# Altium PCB CME_M5_DevBrd_V1.PcbDoc (part 2 of 2)
Units mil, origin at the board's own origin, x right, y up, seen from the top; angles counter-clockwise.
Board outline 3755 x 3680 mil, 2 copper layers (Top Layer, Bottom Layer); 105 components, 0 nets, 635 pads, 230 vias.
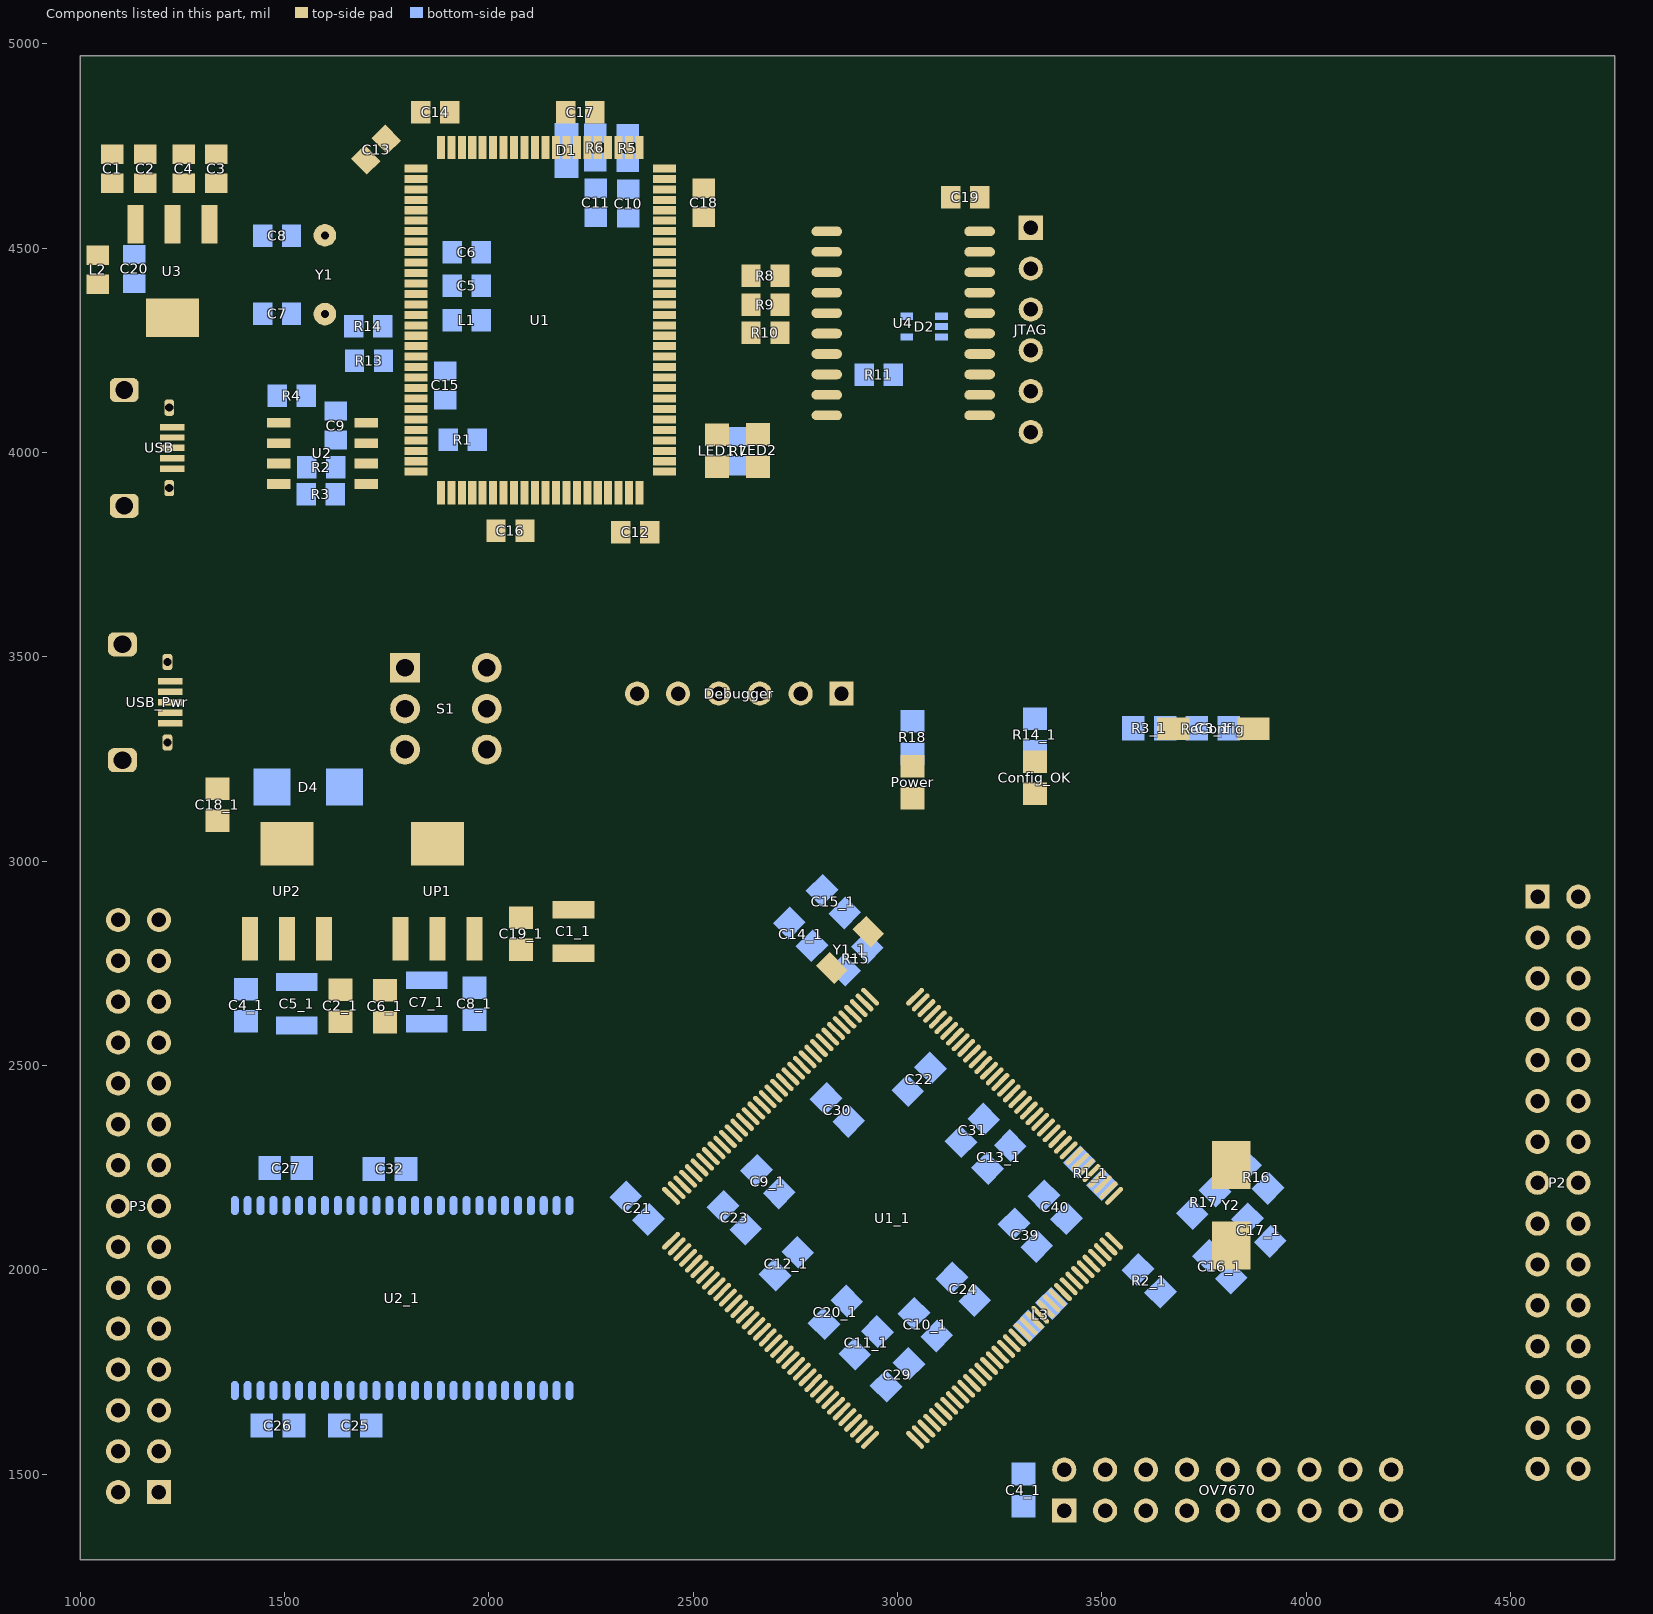
[diagram p2: the components of this part, seen from the top]

## Via types
v1: diameter 24, hole 12, Top Layer to Bottom Layer, 228 vias
v2: diameter 30, hole 15, Top Layer to Bottom Layer, 2 vias

## Nets (pads, with @x,y where several pads share a name; then routed paths per layer and width w, separated by ;. In a path a pad name is that pad's centre, name@x,y a point inside that pad or via, vN(x,y) a via of type N, cw(c..) or ccw(c..) an arc to the next point about the centre after c; other vN are vias at no path point) (continued)
copper on no net: | length 191772.4
  Top Layer w10: 1022,3343 1022,1527 1093,1456 ; 1026,3344 1121.83,3439.83 1220.5,3439.83 1761.83,3439.83 1795,3473 1845,3523 2800,3523 2863,3460 2863,3410 ; 1093,1656 1143,1606 1212,1606 1343,1737 1343,2170 1378,2205 2421.82,2205 2445.84,2180.98 ; 1193,1656 1322,1785 1322,2179 1367,2224 2167,2224 2452,2509 2591.08,2509 2682.47,2417.61 ; 1193,1756 1302,1865 1302,2186 1360,2244 2160,2244 2445,2529 2598.92,2529 2696.39,2431.53 ; 1193,1856 1282,1945 1282,2192 1354,2264 2155,2264 2440,2549 2606.76,2549 2710.31,2445.45 ; 1193,1956 1261,2024 1261,2199 1346,2284 2148,2284 2433,2569 2614.6,2569 2724.23,2459.37 ; 1193,2056 1193,2078 1242,2127 1242,2209 1337,2304 2143,2304 2428,2589 2622.44,2589 2738.15,2473.29 ; 1193,2156 1193,2187 1330,2324 2135,2324 2420,2609 2658.11,2609 2765.99,2501.13 ; 1193,2256 1231,2256 1319,2344 2129,2344 2414,2629 2665.95,2629 2779.9,2515.05 ; 1193,2356 1201,2364 2122,2364 2407,2649 2673.79,2649 2793.82,2528.97 ; 1193,2456 1265,2384 2115,2384 2400,2669 2681.63,2669 2807.74,2542.89 ; 1193,2556 1241,2508 1241,2442 1275,2408 2112.63,2408 2393.63,2689 2689.47,2689 2821.66,2556.81 ; 1193,2656 1193,2627 1262,2558 1262,2452 1287,2427 2102,2427 2384,2709 2725.15,2709 2849.5,2584.64 ; 1193,2756 1193,2733 1285,2641 1285,2464 1304,2445 2094,2445 2378,2729 2732.99,2729 2863.42,2598.56 ; 1193,2855 1308,2740 1308,2488 1330,2466 2084,2466 2367,2749 2740.82,2749 2877.34,2612.48 ; v1@1405.5,2103.5 1490,2019 2449.5,2019 2473.68,2043.18 ; v1(1408,1756) 1413,1761 1413,1781 1474,1842 2467.37,1842 2571.11,1945.74 ; v1(1462,4112.83) 1462,4096.54 1485.72,4072.83 ; v1(1504.54,1985) 1515.54,1996 2452.49,1996 2459.49,2003 2460.06,2003 2485.75,2028.69 ; v1(1518,1866) 2463.53,1866 2557.19,1959.66 ; 1599,4338.37 1699.61,4438.98 1821.73,4438.98 ; 1599,4531.28 1609.54,4531.28 1676.25,4464.58 1821.73,4464.58 ; 1635,3242 1666,3273 1795,3273 ; v1(1643,1891) 2460.69,1891 2543.27,1973.58 ; v1@1643,1971 2457.18,1971 2501.52,2015.34 ; v1(1664,3965.83) 1693.28,3965.83 1700.28,3972.83 1741,3972.83 1746.53,3978.36 1821.73,3978.36 ; v1(1665.57,3898.83) 1676.28,3898.83 1700.28,3922.83 1801,3922.83 1821.73,3943.56 1821.73,3952.76 ; 1698.94,4715.77 1745.42,4669.3 1821.73,4669.3 ; v1(1699,1926) 1708,1917 2458.85,1917 2529.35,1987.5 ; v1(1761,4247.83) 1773.02,4259.85 1821.73,4259.85 ; v1(1761,4296.83) 1772.39,4285.44 1821.73,4285.44 ; v1@1762,1946 1763,1947 2466.23,1947 2496.44,1977.22 2496.44,1978.5 2511.5,1993.56 2511.5,2001.42 2515.44,2001.42 ; v1(1764,4172.83) 1773.5,4182.33 1820.98,4182.33 1821.73,4183.08 ; 1821.73,4208.67 1866.16,4208.67 v1(1867,4207.83) ; 1821.73,4234.26 1821.73,4234.83 1861,4234.83 v1(1872,4245.83) ; 1821.73,4311.03 1822.48,4310.28 1867.54,4310.28 v1(1868,4309.83) ; 1821.73,4413.39 1895.43,4413.39 1896,4412.83 ; 1821.73,4490.17 1822.48,4489.42 1867.41,4489.42 v1(1868,4488.83) ; v1(1850,1754) 1910,1814 2216,1814 2317,1713 2505.4,1713 2654.63,1862.23 ; v1(1884,1581) 1884,1517 2023,1378 2785,1378 2990.84,1583.84 3042.98,1583.84 ; 1904.43,4831.83 1907.6,4828.66 1907.6,4746.82 1908.35,4746.07 ; v1(1937,1542) 1937,1513 2048,1402 2695.5,1402 2905.18,1611.68 ; 1977.17,3978.83 1933.94,3935.59 1933.94,3901.58 1933.94,3855.89 1981,3808.83 2017.57,3808.83 2017.57,3821.39 2061.89,3865.72 2061.89,3901.58 2062,3901.69 2062,3978.83 ; v1(2023,4664.83) 2036.3,4678.13 2036.3,4746.07 ; v1(2028,1471) 2073,1426 2691.66,1426 2891.26,1625.6 ; v1(2065,1530) 2115,1480 2634.31,1480 2835.58,1681.27 ; v1(2077,1471) 2092,1456 2645,1456 2787.01,1598.01 2808,1598.01 2863.42,1653.44 ; 2087.48,3901.58 2088.23,3900.84 2088.23,3809.03 2088.43,3808.83 ; v1(2105,1577) 2154,1528 2626.63,1528 2807.74,1709.11 ; v1(2107,1530) 2108,1530 2136,1502 2628.47,1502 2821.66,1695.19 ; v1(2134,1614) 2134,1604 2188,1550 2620.79,1550 2793.82,1723.03 ; v1(2169,1656) 2169,1619 2215,1573 2615.95,1573 2779.9,1736.95 ; v1(2204,4648.83) 2234.71,4618.12 2430,4618.12 ; 2259.43,4831.83 2266.61,4824.65 2266.61,4746.07 ; v1(2262,1819) 2266,1823 2476.21,1823 2585.03,1931.82 ; v1(2292,3946.83) 2292.2,3946.62 2292.2,3901.58 ; v1(2304,1794) 2309,1799 2491,1799 2566,1874 2582.89,1874 2612.87,1903.99 ; 2317.8,3901.58 2317.8,3809.6 2322.57,3804.83 ; 2335,3978.83 2343.39,3970.44 2343.39,3901.58 2343.39,3856.4 2393.43,3806.36 2393.43,3804.83 ; v1(2347,1768) 2500.79,1768 2622.86,1890.07 2626.79,1890.07 ; 2356,3978.83 2381.12,4003.95 2430,4003.95 ; v1(2365,4673.83) 2425.47,4673.83 2430,4669.3 ; v1(2372,4317.83) 2377.18,4317.83 2395.23,4335.87 2429.25,4335.87 2430,4336.62 ; v1(2380.66,2274) 2459.76,2194.9 ; v1(2383,4361.83) 2429.61,4361.83 2430,4362.21 ; v1(2387,1738) 2502.56,1738 2640.71,1876.15 ; v1(2415,1684) 2504.24,1684 2668.55,1848.31 ; v1(2426,2287) 2451.18,2287 2501.52,2236.66 ; 2430,4106.31 2430.75,4107.06 2492.8,4107.06 2579,4193.26 2579,4230.26 2641.57,4292.83 ; 2430,4131.9 2430.75,4132.65 2490.1,4132.65 2559,4201.54 2559,4282.65 2625.17,4348.83 2641.57,4348.83 ; 2430,4157.49 2486.66,4157.49 2538,4208.83 2538,4335.26 2641.57,4438.83 ; 2430,4311.03 2485.8,4311.03 2493,4303.83 v1(2493,4228.83) ; 2430,4387.8 v1(2480,4387.83) ; 2430,4566.94 2517.54,4566.94 2526,4575.39 ; 2430,4643.71 2523.45,4643.71 2526,4646.26 ; 2444.98,2071.88 2499.09,2126 v1(2503,2126) 2503,2141 2518,2156 2518,2192.34 2487.6,2222.74 ; v1(2448.01,2318) 2515.44,2250.58 ; v1(2449,1654) 2502.08,1654 2682.47,1834.39 ; v1(2455,2437) 2523.89,2437 2612.87,2348.01 ; v1(2464,2485) 2531.56,2485 2640.71,2375.85 ; v1@2479.93,2313.93 2529.35,2264.5 ; v1(2484.53,2365) 2557.19,2292.34 ; v1@2490,2462 2526.73,2462 2626.79,2361.93 ; v1(2493,2413) 2520.05,2413 2598.95,2334.1 ; v1(2503,1627) 2696.39,1820.39 2696.39,1820.47 ; v1(2525,2369) 2536.21,2369 2585.03,2320.18 ; v1(2535,1602) 2535,1631.24 2710.31,1806.55 ; 2543.27,2278.42 2575.69,2246 v1(2628,2246) ; 2558,3964.46 2578.63,3943.83 v1(2608,3943.83) 2637.37,3943.83 2659,3965.46 ; v1(2568,1631) 2568,1636.4 2724.23,1792.63 ; 2598.95,1917.9 2662.05,1981 2668,1981 v1(2673,1986) ; v1(2604,2452) 2604,2440 2654.23,2389.77 2654.63,2389.77 ; v1(2613,1648) 2613,1653.56 2738.15,1778.71 ; 2668.55,2403.69 2754,2318.24 2754,2316 ; 2712.43,4292.83 2824.99,4292.83 2826.99,4290.83 ; 2712.43,4360.83 2769,4360.83 2804,4395.83 2821.99,4395.83 2826.99,4390.83 ; 2712.43,4438.83 2746,4438.83 2798,4490.83 2826.99,4490.83 2819.99,4497.83 ; v1(2749,1520) 2757.82,1520 2877.34,1639.52 ; 2773.14,1785.86 v1(2848,1860.73) ; 2826.99,4190.83 2877,4190.83 v1(2878,4189.83) ; 2828.46,2741.46 2831.88,2741.46 2910.17,2663.17 ; 2849.15,2557.15 2903,2503.31 v1(2903,2496) ; 2849.5,1667.36 2898,1715.85 v1(2898,1761) ; v1(2855,1506) 2855,1533.66 2919.1,1597.76 ; v1@2917.54,2830.54 2948,2800.08 2948,2683.14 2933.88,2669.02 ; 2933.02,1583.84 2978,1628.82 v1(2978,1721) 3017.18,1721 3085.09,1653.09 ; v1(2993,2506) 3088,2601 ; v1(3027,4259.83) 3055,4231.83 3192.01,4231.83 3201.01,4240.83 ; 3042.98,2668.16 3329.82,2955 4624,2955 4666,2913 ; 3056.9,1597.76 3300.66,1354 3471,1354 3508,1391 3508,1411 ; 3056.9,2654.24 3337.66,2935 4462,2935 4536,2861 4618,2861 4666,2813 ; 3070.82,2640.32 3342.5,2912 4433,2912 4472.71,2872.29 4472.71,2821.29 4539,2755 4624,2755 4666,2713 ; 3084.74,1625.6 3258.34,1452 3567,1452 3608,1411 ; 3084.74,2626.4 3347.34,2889 4328,2889 4562,2655 4624,2655 4666,2613 ; v1(3106,1822) 3113,1815 3113,1708.69 3140.42,1681.27 ; v1(3108,4352.83) 3108,4399.83 3107,4400.83 3147,4440.83 3201.01,4440.83 ; 3112.58,1653.44 3205.01,1561 3441,1561 3460,1542 3460,1494 3486,1468 3675,1468 3708,1435 3708,1411 ; 3112.58,2598.56 3116.51,2598.56 3116.51,2606.43 3379.08,2869 4245,2869 4547,2567 4612,2567 4666,2513 ; v1(3121,4271.83) 3121,4279.83 3182,4340.83 3201.01,4340.83 ; 3126.5,1667.35 3169.85,1624 v1(3179,1624) ; 3126.5,2584.65 3389.85,2848 4038,2848 4425,2461 4618,2461 4666,2413 ; 3140.42,2570.73 3374.24,2804.55 4045.45,2804.55 4484,2366 4613,2366 4666,2313 ; 3147.21,1758 3182.18,1723.03 ; 3148,2463 3148,2466.95 3196.1,2515.05 ; 3154.34,1695.19 3232,1617.53 v1(3232,1603) ; 3154.34,2556.81 3369.53,2772 4028,2772 4539,2261 4618,2261 4666,2213 ; 3168.26,1709.11 3297.37,1580 3487,1580 3508,1559 3508,1511 ; 3168.26,2542.89 3372,2746.63 3942.37,2746.63 4528,2161 4618,2161 4666,2113 ; v1(3178,1903) 3178,1866.4 3251.77,1792.63 ; 3182.18,2528.97 3379.21,2726 3867,2726 4525,2068 4611,2068 4666,2013 ; 3196.1,1736.95 3234,1699.05 3234,1681 3317,1598 3560,1598 3608,1550 3608,1511 ; 3201.01,4540.83 3201.43,4541.25 ; 3210.01,1750.87 3270,1690.89 v1(3270,1681) ; 3210.01,2501.13 3408.89,2700 3781,2700 4526,1955 4624,1955 4666,1913 ; 3223.93,1764.79 3372.73,1616 3636,1616 3708,1544 3708,1511 ; 3223.93,2487.21 3414,2677.27 3756.73,2677.27 4493,1941 4493,1888 4516,1865 4614,1865 4666,1813 ; 3237.85,1778.71 3376.56,1640 3664,1640 3757,1547 3757,1462 3808,1411 ; 3237.85,2473.29 3183,2418.44 3183,2361 3228,2316 v1(3293,2316) 3303.27,2316 3349.21,2361.93 ; v1(3241,1888) 3241,1886.92 3293.53,1834.39 ; v1(3243,2371) 3274.76,2371 3307.45,2403.69 ; 3251.77,2459.37 3449.4,2657 3738,2657 4437,1958 4437,1855 4524,1768 4611,1768 4666,1713 ; 3265.69,1806.55 3409.12,1663.12 ; 3265.69,2445.45 3455.24,2635 3725,2635 4409,1951 4409,1758 4507,1660 4619,1660 4666,1613 ; 3279.61,1820.47 3414.08,1686 3729,1686 3859,1556 3859,1460 3908,1411 ; 3279.61,2431.53 3400.08,2552 3699,2552 v1(3726,2579) ; 3280,2265 3280.11,2265 3363.13,2348.01 ; 3287,2186 3404.89,2303.89 3404.89,2306.26 ; 3293.53,2417.61 3336.92,2461 v1@3338,2461 ; 3307.45,1848.31 3444.76,1711 3745,1711 3908,1548 3908,1511 ; 3321.37,1862.23 3450.6,1733 3792,1733 3960,1565 3960,1459 4008,1411 ; 3321.37,2389.77 3463,2531.4 3668.6,2531.4 v1(3673,2527) ; 3335.29,1876.15 3455.44,1756 3816,1756 4008,1564 4008,1511 ; 3335.29,2375.85 3453.44,2494 v1(3695,2494) ; 3349.21,1890.07 3462.27,1777 3841,1777 4060,1558 4060,1459 4108,1411 ; 3363.13,1903.99 3473.11,1794 4022,1794 4303,1513 4566,1513 ; 3366.47,2012 3418.81,1959.66 ; 3377.05,1917.9 3475.87,1819.08 4067.92,1819.08 4274,1613 4566,1613 ; 3377.05,2334.1 3511.95,2469 3704,2469 v1(3748,2513) ; 3390.97,1931.82 3487.71,1835.08 4076.92,1835.08 4270,1642 v1(4412,1642) ; 3390.97,2320.18 3519.79,2449 3750,2449 v1(3775,2474) ; v1(3395,2243) 3397.31,2243 3432.73,2278.42 3430.42,2278.42 ; 3404.89,1945.74 3498.63,1852 4086,1852 4265,1673 v1(4379,1673) ; 3409.12,1663 3684,1663 3792,1555 3792,1527 3808,1511 ; 3418.81,2292.34 3557.47,2431 3844,2431 v1(3858,2445) ; 3432.73,1973.58 3470,1936.31 3470,1912 3509,1873 4094,1873 4260,1707 v1(4345,1707) ; 3446.64,1987.5 3542.15,1892 4120,1892 4258,1754 v1(4345,1754) ; 3446.64,2264.5 3489,2306.85 3489,2331 3563,2405 v1(3593,2405) ; 3460.56,2001.42 3550.99,1911 4133.37,1911 4246.37,1798 v1(4321,1798) ; 3460.56,2250.58 3524,2314.01 v1(3524,2325) ; 3474.48,2015.34 3562.82,1927 4152,1927 4257,1822 v1(4285,1822) ; 3474.48,2236.66 3586.82,2349 3603,2349 v1(3606,2352) ; 3488.4,2029.26 3573.66,1944 4244,1944 v1(4249,1949) ; 3488.4,2222.74 3557.66,2292 v1(3569,2292) ; 3502.32,2208.82 3554.5,2261 3585,2261 v1(3609,2285) ; 3513.53,2031.53 3574.06,1971 3581.06,1978 v1(3588,1978) ; 3516.24,2194.9 3549.34,2228 3594,2228 3614,2248 v1(3617,2248) ; 3525.17,2048.17 3555.34,2018 3675,2018 v1(3724,2067) ; 3530.16,2071.02 3563.02,2071.02 v1@3686.5,2194.5 ; 3531.02,2180.12 3550.14,2161 v1(3553,2161) ; 3801,2267 3852,2267 3884,2235 v1(3884,2167)
  Top Layer w15: 1043,4411.39 1043,4106.83 1087.74,4062.08 1224.93,4062.08 ; 1224.93,4010.9 1225.15,4010.69 1269.64,4010.69 1270.07,4010.26 1272.71,4010.26 1277.21,4005.76 1301.65,4005.76 1306.58,4010.69 1336.86,4010.69 1415,4088.83 1415,4185.83 1494,4264.83 1626,4264.83 v1(1655,4293.83) ; 1224.93,4036.49 1279.19,4036.49 1280.43,4035.26 v1(1289.43,4035.26) ; v1(1659,4020.83) 1698.28,4020.83 1700.28,4022.83 ; v1(1673,4096.83) 1676.28,4096.83 1700.28,4072.83 ; 1977.17,3978.83 2062,3978.83 2238,3978.83 2335,3978.83 2356,3978.83 ; v1(2492,4071.83) 2516.5,4096.33 2603.5,4096.33 v1(2611,4088.83) ; v1(2635,3126) 2860,3351 v1(3032,3351) ; 3181,4140.83 3201.01,4140.83 ; 3201.01,4240.83 3317,4240.83 3326,4249.83 ; 3201.01,4340.83 3317,4340.83 3326,4349.83 ; 3201.01,4440.83 3317,4440.83 3326,4449.83 ; 3201.01,4490.83 3201.01,4540.83 ; 3201.43,4541.25 3201.43,4624.83 ; v1(3724,2067) 3739.81,2067 3833,2067
  Top Layer w20: 1079,4729.26 1159,4729.26 1254,4729.26 1333,4729.26 ; v1(1635,3176) 1635,3242 ; 1749.05,4765.88 1754.99,4765.88 ; 1821.73,4029.54 1861.71,4029.54 v1(1862,4029.83) ; 1821.73,4699.14 1754.99,4765.88 ; 1833.57,4831.83 1767.62,4765.88 1754.99,4765.88 ; 1874,2809.86 1874,2744 1876,2746 v2(1888,2746) ; v1(1972,4249.83) 1972,4125.83 2091,4125.83 v1@2238,3978.83 ; v1(2503,2126) 2553,2126 2573,2146 v1(2579,2146) 2584,2146 2754,2316 2823,2385 v1(2823,2401) ; v1(2848,1860.73) 2848,1861 2948,1761 ; v1(2903,2496) 2983,2496 v1(2993,2506) ; v1(2978,1721) 2978,1731 2948,1761 ; 3287,2186 3287,2012 ; 3366.47,2012 3287,2012 ; 2948,1761 3090,1903 v1(3178,1903) 3287,2012
  Top Layer w30: 1043,4482.26 1071.57,4510.83 v1(1114,4510.83) 1114,4536.55 1135.45,4558 1135.45,4634.84 1159,4658.39 1079,4658.39 ; 1226,4558 1226,4630.39 1254,4658.39 1333,4658.39 1393.57,4658.39 1451.57,4716.39 1451.57,4768.39 1511,4827.83 v1(1553,4827.83) 1687.11,4827.83 1749.05,4765.88 ; 1336,3177.37 1337.63,3179 v1(1468,3179) 1582,3179 1598,3163 1598,3160.67 1619.67,3139 1622,3139 1699,3062 1699,2922 ; 1746,2684.37 1745,2685.37 1637,2685.37 1647,2695.37 1647,2757.41 1598.55,2805.86 1598.55,2860.55 1660,2922 1699,2922 ; 2207,2881.15 2098.78,2881.15 2079,2861.37 1967.63,2861.37 1907,2922 1699,2922 ; v1(2524,4779.83) 2524,4648.26 2526,4646.26
  Bottom Layer w10: 1093,1756 1139,1710 1230,1710 1357.71,1837.71 1357.71,2181.08 1360.05,2183.42 1360.05,2218.06 1464.99,2323 1835,2323 1863,2295 ; 1093,1856 1150,1799 1234,1799 1335.31,1900.31 1335.31,2231.31 1445,2341 1848,2341 1892,2297 2416,2297 v1(2426,2287) ; 1093,1956 1134,1915 1218,1915 1309,2006 1309,2231 1435,2357 1887,2357 1924,2320 2446.01,2320 v1(2448.01,2318) ; 1093,2056 1098,2056 1143,2011 1231,2011 1291,2071 1291,2242 1422,2373 1911,2373 1939,2345 2463,2345 v1(2487,2321) ; 1093,2156 1142,2107 1222,2107 1274,2159 1274,2259 1404,2389 1944,2389 1962,2371 v1@2484.53,2371 ; 1093,2256 1114,2256 1164,2206 1212,2206 1257,2251 1257,2282 1380,2405 1969,2405 1986,2388 2494.06,2388 2513.06,2369 v1(2525,2369) ; 1093,2356 1144,2305 1247,2305 1363,2421 2017,2421 2025,2413 v1(2493,2413) ; 1093,2456 1098,2456 1146,2408 1220,2408 1249,2437 v1(2455,2437) ; 1093,2556 1142,2507 1223,2507 1269,2461 v1(2490,2461) ; 1093,2656 1144,2605 1217,2605 1247,2575 1247,2522 1284,2485 v1(2464,2485) 2479.6,2485 ; 1093,2756 1109,2756 1155,2710 1213,2710 1287,2636 1287,2533 1310,2510 2534,2510 2592,2452 v1(2604,2452) ; v1(1408,1756) 1408,1706.67 1410.05,1704.62 ; v1(1408,2106) 1410.05,2108.05 1410.05,2157.38 ; 1504.54,1704.62 1504.54,1852.54 v1(1518,1866) ; v1(1504.54,1985) 1504.54,2157.38 ; 1517.43,4339.83 1597.54,4339.83 1599,4338.37 ; 1517.43,4529.83 1597.54,4529.83 1599,4531.28 ; 1599.02,1704.62 1599.02,1847.02 v1(1643,1891) ; 1599.02,2157.38 1599.02,2009.98 v1(1643,1966) ; 1606.43,3964.83 1625,3964.83 1626,3965.83 v1(1664,3965.83) ; 1610,3909.83 1621,3898.83 v1(1665.57,3898.83) ; 1693.51,1704.62 1693.51,1920.51 v1(1699,1926) ; 1693.51,2157.38 1693.51,2005.49 v1(1753,1946) ; 1850.99,1704.62 v1@1850.99,1753.01 ; 1850.99,2157.38 1850.99,1990.01 1999,1842 2230,1842 2262,1810 v1(2262,1819) ; 1860,2296 1882,2274 v1(2380.66,2274) ; v1(1868,4488.83) v1@1869,4489.83 ; 1882.49,1704.62 1882.49,1582.51 v1(1884,1581) ; 1882.49,2157.38 1882.49,1993.51 2012,1864 2253.37,1864 2304,1813.37 v1(2304,1794) v1@2304,1800 ; 1913.98,1704.62 1913.98,1633.02 1937,1610 v1(1937,1542) ; 1913.98,2157.38 1913.98,2000.02 2029,1885 2268,1885 2347,1806 v1(2347,1768) ; 1945.48,2157.38 1945.48,2002.52 2042,1906 2283,1906 2387,1802 v1(2387,1738) ; 1972,4313.39 1981.43,4322.83 ; 1976.98,1704.62 1976.98,1522.02 v1(2028,1471) ; 1976.98,2157.38 1976.98,2014.02 2062,1929 2289,1929 2415,1803 v1@2415,1682 ; 2008.47,1704.62 2008.47,1539.53 v1(2077,1471) ; 2008.47,2157.38 2008.47,2022.53 2082,1949 2300,1949 2450,1799 v1@2450,1657 ; 2039.97,1704.62 2039.97,1555.03 v1(2065,1530) ; 2039.97,2157.38 2039.97,2028.03 2096,1972 2310,1972 2477,1805 2477,1602 2561,1518 2742,1518 v1@2748,1524 ; 2071.46,1704.62 2071.46,1565.54 v1(2107,1530) ; 2071.46,2157.38 2071.46,2041.54 2120,1993 2323,1993 2503,1813 v1(2503,1627) ; 2102.96,1704.62 2102.96,1579.04 v1(2105,1577) ; 2102.96,2157.38 2102.96,2046.04 2132,2017 2343,2017 2532,1828 v1@2532,1594 ; v1@2134.46,1614 2134.46,1704.62 ; 2134.46,2157.38 2134.46,2062.54 2156,2041 2358,2041 2560,1839 2560,1639 v1(2568,1631) ; 2165.95,1704.62 2165.95,1648.05 2169,1651.09 v1(2169,1656) ; 2165.95,2157.38 2165.95,2082.05 2185,2063 2365,2063 2589,1839 2589,1672 v1(2613,1648) ; 2340,4706.83 2341,4705.83 ; 2341,4644.26 2341,4705.83 ; v1(2365,4673.83) 2365,4681.83 2341,4705.83 ; v1(2383,4361.83) 2454,4361.83 2629,4186.83 2629,4159.83 v1(2536,4066.83) ; v1(2415,1684) 2415,1763 ; 2468,3421 2468,3389 3518,2339 ; v1(2480,4387.83) 2480,4366.83 2655.94,4190.88 2655.94,4076.88 v1(2663,4069.83) ; v1(2484.53,2365) v1@2494,2365 ; v1@2535,1597 v1(2535,1602) ; 2566,3410 2566,3325.53 3569,2322.53 v1(3569,2292) ; 2666,3421 2666,3253.82 3594.82,2325 3596,2325 3609,2312 v1(3609,2285) ; 2767,3410 2767,3184 3597,2354 v1@3606,2354 ; 2790.84,2793.16 2790.84,2768.16 v1(2833,2726) ; 2870.84,2873.16 2885.84,2873.16 v1(2928,2831) 2928,2791 2925.84,2788.84 ; v1(2878,4189.83) 2918.57,4189.83 ; 2989.43,4189.83 2977,4202.26 2977,4317.83 2992.59,4333.42 3022.68,4333.42 ; 3022.68,4282.24 3022.68,4264.15 v1(3027,4259.83) ; v1@3037,3342 3167,3472 3429.89,3472 3576.63,3325.26 ; 3107.32,4307.83 3143,4307.83 ; 3170,3248 3170,3280 3237,3347 3338,3347 ; 3171,3260.37 3171,2808.28 3574.28,2405 v1(3593,2405) ; v1@3181,1626 v1(3179,1624) 3179,1616 3223,1572 4047,1572 4108,1511 ; v1(3232,1603) 4116,1603 4208,1511 ; v1(3270,1681) 3324,1627 4158,1627 4262.5,1522.5 4262.5,1465.5 4208,1411 ; v1(3395,2243) 3424.32,2243 3445.16,2263.84 ; 3397.37,1421.63 3408,1411 ; v1@3622,2251 3639,2268 3639,2398 3508,2529 3508,3101.63 3731.63,3325.26 ; v1(3673,2527) 3698,2552 4305,2552 4566,2813 ; v1(3695,2494) 3696.47,2494 3738.47,2536 4389,2536 4566,2713 ; v1(3726,2579) 3733,2586 4217,2586 4544,2913 4566,2913 ; v1(3748,2513) 4466,2513 4566,2613 ; v1(3775,2474) 3791,2490 4543,2490 4566,2513 ; v1(3858,2445) 4534,2445 4566,2413 ; v1(4249,1949) 4486.75,2186.75 4486.75,2233.75 4566,2313 ; v1(4285,1822) 4285,1896 4495.75,2106.75 4495.75,2142.75 4566,2213 ; v1(4321,1798) 4321,1868 4566,2113 ; v1(4345,1707) 4360,1707 4566,1913 ; v1(4345,1754) 4492,1901 4492,1961 4544,2013 4566,2013 ; v1(4379,1673) 4519,1813 4566,1813 ; v1(4412,1642) 4451,1642 4522,1713 4566,1713
  Bottom Layer w15: 1093,1556 1193,1556 1460.37,1556 1476.34,1571.97 1489.69,1571.97 1489.69,1585.32 1523.37,1619 ; v1@1287.5,4029.33 1468,4209.83 1656.57,4209.83 1671.57,4224.83 ; v1@1289.43,4026.26 v1(1289.43,4035.26) ; 1378.55,2157.38 1378.55,2197.92 1441.63,2261 ; 1441.54,1704.62 1441.54,1622.09 1444.63,1619 ; 1441.54,2157.38 1441.63,2157.46 1441.63,2261 ; 1520.37,2261 1520.37,2242.63 1536.03,2226.97 1536.03,2157.38 ; 1536.03,1704.62 1536.03,1651.03 1523.37,1638.37 1523.37,1619 ; 1625,4030.39 1649.43,4030.39 v1(1659,4020.83) ; 1625,4101.26 1668.57,4101.26 v1(1673,4096.83) ; 1630.52,1704.62 1628,1702.1 1628,1637 1633.63,1631.37 1633.63,1619 ; 1718.63,2247 1718.63,2230.37 1726,2223 1726,2158.37 1725.01,2157.38 1725.01,2084.99 v1(1738,2072) ; v1(1868,4309.83) 1881,4322.83 1910.57,4322.83 ; v1@1869,4489.83 1910.57,4489.83 ; 2107,4354.83 2317,4354.83 2354,4317.83 v1(2372,4317.83) ; 2197.45,2157.38 2197.45,2210.55 2161,2247 1797.37,2247 ; v1(2236,3981.83) 2320,4065.83 2484,4065.83 v1@2491,4072.83 ; v1(2292,3946.83) 2460,3946.83 2544,3862.83 2885,3862.83 v1(3160,4137.83) ; 2300,2791 v1(2635,3126) ; 2611,4038.26 v1(2611,4088.83) ; 2989.43,4189.83 3009.43,4169.83 3306,4169.83 3326,4149.83 ; v1@3308,1500.37 3397.37,1500.37 3408,1511 ; v1(3679,2202) 3744,2202 3766.5,2179.5 3851.84,2264.84 3856.16,2264.84 ; 3709,2122 3761.16,2069.84 3761.16,2034.84 ; 3856.16,2124.84 3856.16,2139.16 v1(3884,2167) 3911.84,2194.84 3911.84,2209.16 ; 1441.63,2261 1460,2261 1496,2297 1638,2297 1786,2297 1797.37,2285.63 1797.37,2247 ; 1523.37,1619 1523.37,1603.63 1583,1544 1660,1544 1712.37,1596.37 1712.37,1619 1712.37,1632.37 1725.01,1645.01 1725.01,1704.62 1725.01,1783.01 1808,1866 1808,2054 1788,2074 1788,2157.38 1788,2217 1797.37,2226.37 1797.37,2247
  Bottom Layer w20: 1093,1456 1193,1456 ; v1@1508,3079 1508,2756 v2(1495,2743) 1495,2739.15 1530,2704.15 ; 1553.57,3897.83 1554.57,3898.83 1554.57,3963.83 1553.43,3964.96 1553.43,4138.83 1604,4138.83 1619,4123.83 ; 1630.52,2157.38 1630.52,2289.52 1638,2297 ; v1(1673,4096.83) 1716,4139.83 1805,4139.83 1864.43,4199.26 1894,4199.26 1921.43,4199.26 v1(1972,4249.83) 1972,4313.39 ; 1848,2708.15 1885.85,2746 v2(1888,2746) ; v1(1862,4029.83) 1863,4030.83 1900.57,4030.83 ; v1(1876,2849) v1(1876,3086) ; 1910.57,4322.83 1910.57,4407.83 1910.57,4489.83 ; 1981.43,4322.83 2075,4322.83 2107,4354.83 2107,4701.83 2152.19,4747.02 2158.82,4747.02 2190,4778.2 2193.06,4781.26 2261,4781.26 2339,4781.26 2340,4780.26 ; 2190,4699.46 2250.06,4699.46 2261,4710.39 2262,4709.39 2262,4646.26 2206.57,4646.26 v1(2204,4648.83) ; 2197.45,2157.38 2226.62,2157.38 2279,2105 2372.64,2105 2390.84,2123.2 ; 2262,4575.39 2339,4575.39 2341,4573.39 ; 2395.84,2118.16 2495.16,2118.16 v1(2503,2126) ; 2655.16,2243.84 2624,2212.68 2624,2188 2690.16,2121.84 2690.16,2003.16 ; v1(2673,1986) 2673,1914 2826,1761 v1(2898,1761) 2938,1761 3008,1831 3088.68,1831 3095.84,1838.16 3297.3,1838.16 3321.37,1862.23 3283,1900.6 3283,1973 3199,2057 3199,2115 3276.53,2192.53 3276.53,2303.15 3275.84,2303.84 ; 2820.16,1868.16 2820.16,1889.16 2831.71,1900.71 2815.47,1900.71 2815.47,1933.52 2866.16,1984.21 2915.21,1984.21 3057,2126 3057,2285.04 3145.48,2373.53 3210.84,2373.53 ; 2825.16,2418.84 v1@2902.66,2496.34 ; v1(2978,1721) 2978,1605 3161.37,1421.63 3308,1421.63 3397.37,1421.63 ; v1(2993,2506) 3068.68,2506 3080.84,2493.84 3105.16,2493.84 3210.84,2388.16 3210.84,2373.53 ; 3210.84,2368.84 3210.84,2373.53 ; 3377.05,1917.9 3326,1968.95 3326,2033.32 3360.84,2068.16 3430.84,2138.16 3530.16,2138.16 v1(3553,2161)
  Bottom Layer w30: v1(1114,4510.83) 1114,4503.26 1133,4484.26 ; v1(1136,4617.83) 1136,4618.83 1402,4884.83 3189,4884.83 3314,4759.83 3314,4561.83 3326,4549.83 ; 1406,2686.37 1423.78,2704.15 1530,2704.15 1616.85,2791 2300,2791 2453,2791 2825.16,2418.84 ; v1(1553,4827.83) 2140.37,4827.83 2190,4778.2 3084.63,4778.2 3084.63,4777.2 v1(3217,4644.83) ; 1848,2708.15 1947.22,2708.15 1965,2690.37 2461.63,2690.37 2711,2441 2711,2299.68 2655.16,2243.84 ; 3655.37,3325.26 3731.63,3325.26
  other v1: 3011,1384 1374,1424 1624,1424 1784,1424 4405,1428 3303,1493 4427,1562 1579,1621 1318,1631 2300,1642 1946,1650 3015,1655 4053,1678 3995,1725 4494,1734 3060,1738 2053,1780 1810,1794 1272,1796 2836,1808 1263,1884 2750,1912 4465,1920 1410,1921 2971,1943 3703,1989 4067,2017 1551,2071 3646,2080 1820,2098 2210,2099 2909,2101 3089,2119 4070,2129 2835,2143 3604,2190 2969,2197 2564,2219 2279,2234 2777,2246 4287,2246 2442,2252 2641,2302 4503,2337 4285,2353 3727,2357 3888,2360 4394,2364 4496,2404 3340,2452 2053,2546 3583,2596 4078,2678 2133,2733 4254,2740 4182,2812 4508,2832 4334,2840 4410,2870 1301,2919 1503,3072 2216,3083 2401,3083 3813,3083 4332,3094 1185,3145 3039,3244 3338,3254.63 2220,3293 2390,3293 1497,3315 3690,3320 3845,3322 4332,3366 1523,3555 1148,3937.83 1757,3950.83 1148,4008.83 2100,4220.83 2201,4220.83 2200,4303.83 2200,4389.83 1574,4447.83 1402,4450.83 1488,4450.83 2203,4471.83 2489,4485.83 1422,4521.83 1945,4574.83 2023,4575.83 1945,4664.83 1832,4763.83 2261,4805.83 1626,4827.83 1689,4827.83

## Polygon pours and split planes (outlines as drawn)
no net on Top Layer "NONET_L01_P004" (solid, remove dead copper, pour order 4): 995,3577.17 995,1304 4751,1304 4751,3581.17
no net on Top Layer "NONET_L01_P000" (solid, remove dead copper, pour order 0): 993,4953.83 992.96,4971.83 3421,4971.81 3421,3665.83 996.01,3665.83
no net on Bottom Layer "NONET_L02_P006" (solid, remove dead copper, pour order 6): 994,3582 994,1301 4753,1301 4753,3582
no net on Bottom Layer "NONET_L02_P002" (solid, remove dead copper, pour order 2): 993.04,4970.83 3422,4970.83 3422,3665.83 996,3665.83 996,3670.83

## Other copper
Top Layer:
  rectangle: 993,4842.83 1117,4970.83
  rectangle: 3283,4835.83 3421,4969.83
  rectangle: 3290,3665.83 3421,3801.83
  rectangle: 996.01,3665.83 1136,3793.83
  rectangle: 1031,3817.83 1173,3965.83
  rectangle: 1180,3856.83 1263,3941.83
  rectangle: 1119,3987.89 1184.93,4043.83
  rectangle: 1061,4120.83 1291,4214.83
  rectangle: 1076.49,4101.88 1259.49,4127.88
  rectangle: 1172,4080.83 1260,4110.83
  rectangle: 3270,3992.83 3387,4095.83
Bottom Layer:
  rectangle: 996,3675.83 1114,3806.83
  rectangle: 993,4814.83 1121,4970.83
  rectangle: 3299,4834.83 3413,4960.83
  rectangle: 3293,3669.83 3414,3806.83
  rectangle: 1047,3815.83 1257,4226.83
  rectangle: 3278,3991.83 3380,4098.83

## Silkscreen, mask and mechanical layers (free items; w line width, h text height)
Top Overlay:
  text "CME JTAG / Debugger / V1.0" at 2770,3690.83 h60
  text "CME-M5 / DevBrd / v1.00" at 4320,3280 h60
  text "3v3" at 1419,2896 h60
  text "1v2" at 1797,2896 h60
  text "CME-M5" at 2821,2242 h60
Bottom Overlay:
  text "5V" at 3270,4531.83 h50
  text "TCK" at 3276,4415.83 h50
  text "TMS" at 3270,4309.83 h50
  text "TDI" at 3265,4213.83 h50
  text "TD0" at 3269,4110.83 h50
  text "GND" at 3265,4019.83 h50
  text "16MB SDRAM / MT48LC16M8A2" at 2135,1861 h60
Mechanical 1:
  rectangle: 1000,1290 4755,4970
  lines w30: 1000,1290 1000,4970 4755,4970 4755,1290 1000,1290

## Text inside footprints (layer, text, board x,y; h text height)
P2: Top Overlay "1" at 4546,3013 h50 r270; Top Overlay "2" at 4646,3013 h50 r270; Top Overlay "29" at 4546,1453 h50 r270; Top Overlay "30" at 4646,1453 h50 r270
P3: Top Overlay "1" at 1213,1356 h50 r90; Top Overlay "2" at 1113,1356 h50 r90; Top Overlay "29" at 1213,2916 h50 r90; Top Overlay "30" at 1113,2916 h50 r90